# Altium PCB first_test.PcbDoc (part 5 of 5)
Units mil, origin at the board's own origin, x right, y up, seen from the top; angles counter-clockwise.
Board outline 3440.59 x 3087.6 mil, 4 copper layers (Top Layer, GND, VCC, Bottom Layer); 175 components, 91 nets, 2807 pads, 1128 vias.
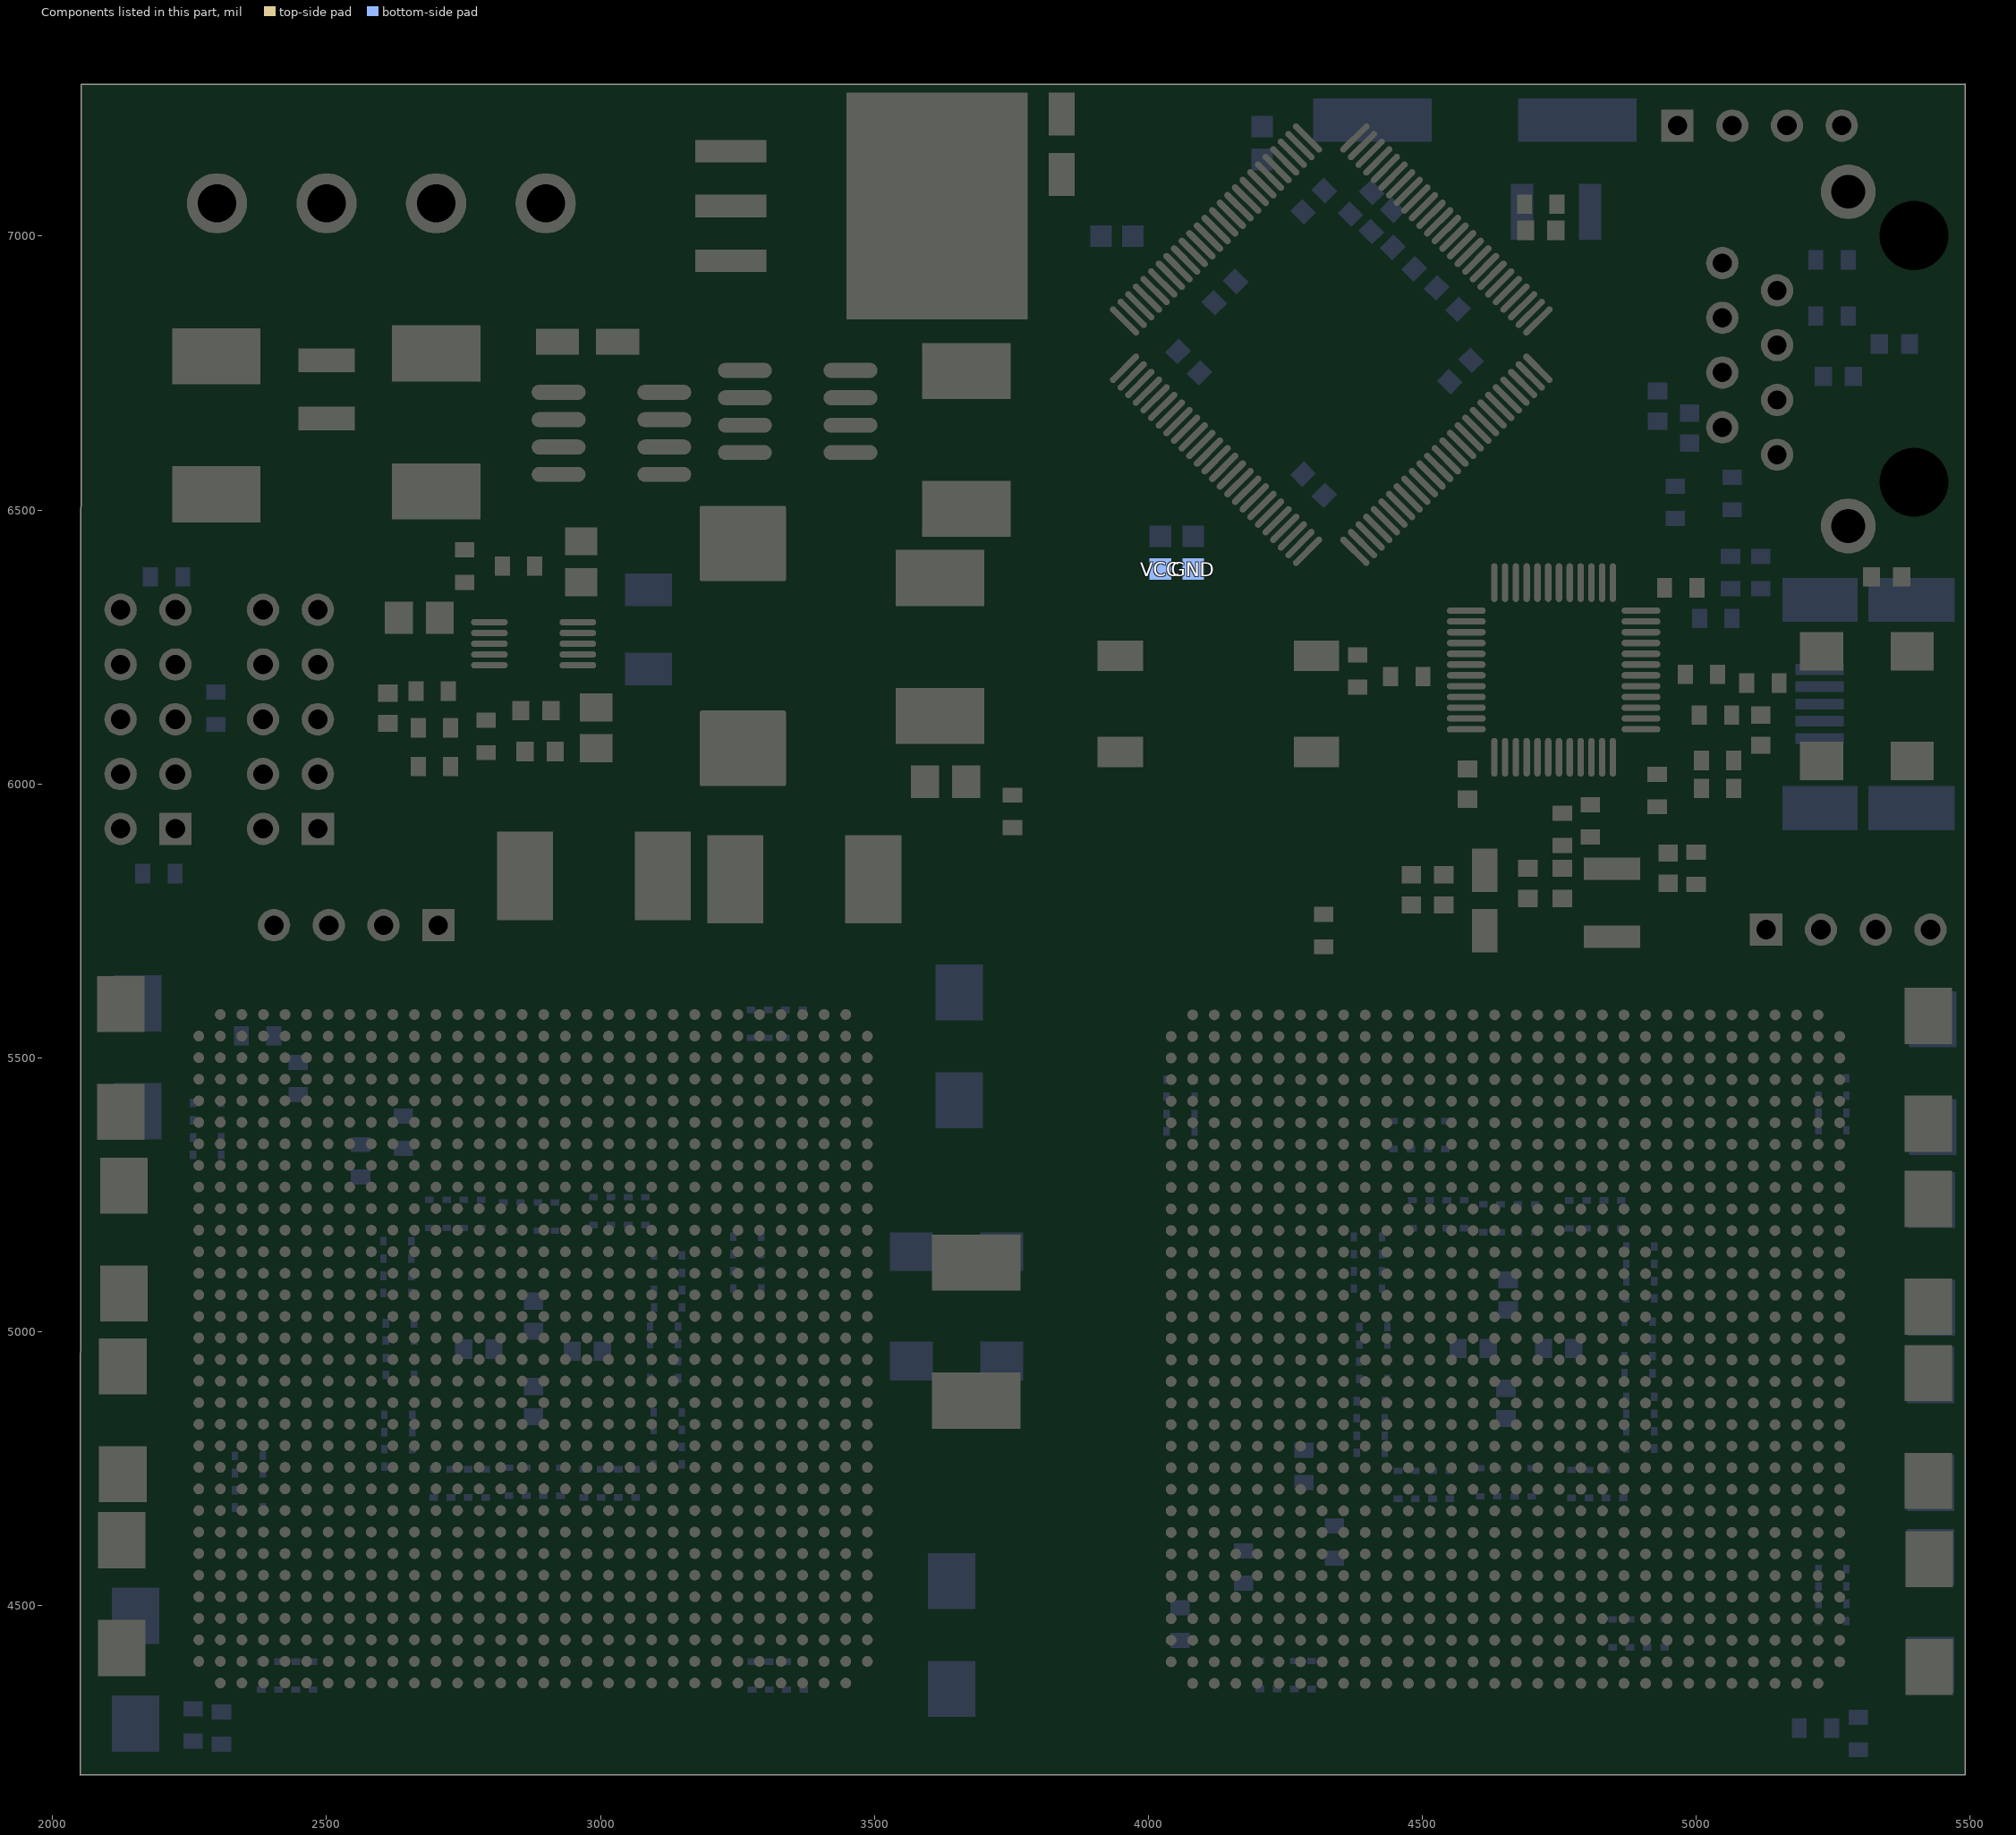
[diagram p7: the components of this part, seen from the top]

## Via types
v1: diameter 20, hole 13, Top Layer to Bottom Layer, tented both sides, 907 vias
v2: diameter 20, hole 13, Top Layer to Bottom Layer, 189 vias
v3: diameter 30, hole 20, Top Layer to Bottom Layer, 14 vias
v4: diameter 40, hole 30, Top Layer to Bottom Layer, 12 vias
v5: diameter 50, hole 40, Top Layer to Bottom Layer, 5 vias
v6: diameter 25, hole 20, Top Layer to Bottom Layer, 1 vias

## Nets (pads, with @x,y where several pads share a name; then routed paths per layer and width w, separated by ;. In a path a pad name is that pad's centre, name@x,y a point inside that pad or via, vN(x,y) a via of type N, cw(c..) or ccw(c..) an arc to the next point about the centre after c; other vN are vias at no path point) (continued)
pads on no net: ARM.4 ARM.6 ARM.7 ARM.8 ARM.9 ARM.14 ARM.16 ARM.18 ARM.20 ARM.21 ARM.26 ARM.27 ARM.32 ARM.33 ARM.34 ARM.35 ARM.36 ARM.37 ARM.38 ARM.39 ARM.40 ARM.43 ARM.44 ARM.45 ARM.46 ARM.47 ARM.50 ARM.51 ARM.56 ARM.57 ARM.58 ARM.59 ARM.60 ARM.61 ARM.76 ARM.77 ARM.78 ARM.79 ARM.80 ARM.81 ARM.82 ARM.85 ARM.100 ETHERNET.1 ETHERNET.5 ETHERNET.6 ETHERNET.8 ETHERNET.9 ETHERNET.10 ETHERNET.11 ETHERNET.12 ETHERNET.25 ETHERNET.33 ETHERNET.38 ETHERNET.42 ETHERNET.45 ETHERNET.46 FPGA1.A4 FPGA1.A5 FPGA1.A6 FPGA1.A7 FPGA1.A8 FPGA1.A9 FPGA1.A10 FPGA1.A11 FPGA1.A12 FPGA1.A14 FPGA1.A16 FPGA1.A17 FPGA1.A21 FPGA1.A22 FPGA1.A23 FPGA1.A24 FPGA1.A25 FPGA1.A26 FPGA1.A27 FPGA1.A28 FPGA1.A29 FPGA1.AA1 FPGA1.AA2 FPGA1.AA3 FPGA1.AA4 FPGA1.AA6 FPGA1.AA7 FPGA1.AA8 FPGA1.AA9 FPGA1.AA10 FPGA1.AA11 FPGA1.AA22 FPGA1.AA23 FPGA1.AA24 FPGA1.AA25 FPGA1.AA26 FPGA1.AA27 FPGA1.AA29 FPGA1.AA30 FPGA1.AA31 FPGA1.AA32 FPGA1.AB1 FPGA1.AB2 FPGA1.AB3 FPGA1.AB4 FPGA1.AB5 FPGA1.AB6 FPGA1.AB7 FPGA1.AB8 FPGA1.AB9 FPGA1.AB10 FPGA1.AB11 FPGA1.AB12 FPGA1.AB13 FPGA1.AB14 FPGA1.AB15 FPGA1.AB16 FPGA1.AB17 FPGA1.AB18 FPGA1.AB19 FPGA1.AB20 FPGA1.AB21 FPGA1.AB23 FPGA1.AB24 FPGA1.AB25 FPGA1.AB26 FPGA1.AB27 FPGA1.AB28 FPGA1.AB29 FPGA1.AB30 FPGA1.AB31 FPGA1.AB32 FPGA1.AC1 FPGA1.AC2 FPGA1.AC3 FPGA1.AC4 FPGA1.AC6 FPGA1.AC7 FPGA1.AC8 FPGA1.AC9 FPGA1.AC11 FPGA1.AC12 FPGA1.AC13 FPGA1.AC14 FPGA1.AC15 FPGA1.AC16 FPGA1.AC17 FPGA1.AC18 FPGA1.AC19 FPGA1.AC20 FPGA1.AC21 FPGA1.AC22 FPGA1.AC24 FPGA1.AC25 FPGA1.AC26 FPGA1.AC27 FPGA1.AC29 FPGA1.AC30 FPGA1.AC31 FPGA1.AC32 FPGA1.AD1 FPGA1.AD2 FPGA1.AD3 FPGA1.AD4 FPGA1.AD6 FPGA1.AD7 FPGA1.AD8 FPGA1.AD9 FPGA1.AD10 FPGA1.AD11 FPGA1.AD12 FPGA1.AD13 FPGA1.AD14 FPGA1.AD18 FPGA1.AD19 FPGA1.AD20 FPGA1.AD21 FPGA1.AD22 FPGA1.AD23 FPGA1.AD24 FPGA1.AD25 FPGA1.AD26 FPGA1.AD27 FPGA1.AD29 FPGA1.AD30 FPGA1.AD31 FPGA1.AD32 FPGA1.AE1 FPGA1.AE2 FPGA1.AE3 FPGA1.AE4 FPGA1.AE5 FPGA1.AE6 FPGA1.AE9 FPGA1.AE10 FPGA1.AE11 FPGA1.AE12 FPGA1.AE13 FPGA1.AE14 FPGA1.AE19 FPGA1.AE20 FPGA1.AE21 FPGA1.AE22 FPGA1.AE23 FPGA1.AE25 FPGA1.AE26 FPGA1.AE27 FPGA1.AE28 FPGA1.AE29 FPGA1.AE30 FPGA1.AE31 FPGA1.AE32 FPGA1.AF1 FPGA1.AF2 FPGA1.AF3 FPGA1.AF4 FPGA1.AF5 FPGA1.AF6 FPGA1.AF10 FPGA1.AF11 FPGA1.AF12 FPGA1.AF13 FPGA1.AF14 FPGA1.AF15 FPGA1.AF16 FPGA1.AF19 FPGA1.AF20 FPGA1.AF21 FPGA1.AF22 FPGA1.AF23 FPGA1.AF27 FPGA1.AF28 FPGA1.AF29 FPGA1.AF30 FPGA1.AF31 FPGA1.AF32 FPGA1.AG1 FPGA1.AG2 FPGA1.AG3 FPGA1.AG4 FPGA1.AG8 FPGA1.AG9 FPGA1.AG10 FPGA1.AG11 FPGA1.AG12 FPGA1.AG13 FPGA1.AG14 FPGA1.AG15 FPGA1.AG16 FPGA1.AG17 FPGA1.AG18 FPGA1.AG19 FPGA1.AG20 FPGA1.AG21 FPGA1.AG22 FPGA1.AG23 FPGA1.AG24 FPGA1.AG25 FPGA1.AG29 FPGA1.AG30 FPGA1.AG31 FPGA1.AG32 FPGA1.AH1 FPGA1.AH2 FPGA1.AH3 FPGA1.AH4 FPGA1.AH5 FPGA1.AH6 FPGA1.AH7 FPGA1.AH8 FPGA1.AH9 FPGA1.AH11 FPGA1.AH13 FPGA1.AH14 FPGA1.AH15 FPGA1.AH16 FPGA1.AH17 FPGA1.AH18 FPGA1.AH19 FPGA1.AH20 FPGA1.AH22 FPGA1.AH24 FPGA1.AH25 FPGA1.AH26 FPGA1.AH28 FPGA1.AH29 FPGA1.AH30 FPGA1.AH31 FPGA1.AH32 FPGA1.AJ1 FPGA1.AJ2 FPGA1.AJ5 FPGA1.AJ6 FPGA1.AJ7 FPGA1.AJ8 FPGA1.AJ10 FPGA1.AJ11 FPGA1.AJ12 FPGA1.AJ13 FPGA1.AJ14 FPGA1.AJ15 FPGA1.AJ16 FPGA1.AJ17 FPGA1.AJ18 FPGA1.AJ19 FPGA1.AJ20 FPGA1.AJ21 FPGA1.AJ22 FPGA1.AJ23 FPGA1.AJ25 FPGA1.AJ26 FPGA1.AJ27 FPGA1.AJ28 FPGA1.AJ31 FPGA1.AJ32 FPGA1.AK4 FPGA1.AK5 FPGA1.AK6 FPGA1.AK7 FPGA1.AK8 FPGA1.AK9 FPGA1.AK10 FPGA1.AK11 FPGA1.AK12 FPGA1.AK13 FPGA1.AK16 FPGA1.AK17 FPGA1.AK18 FPGA1.AK20 FPGA1.AK21 FPGA1.AK22 FPGA1.AK23 FPGA1.AK24 FPGA1.AK25 FPGA1.AK26 FPGA1.AK27 FPGA1.AK28 FPGA1.AK29 FPGA1.AK30 FPGA1.AL3 FPGA1.AL4 FPGA1.AL5 FPGA1.AL6 FPGA1.AL7 FPGA1.AL8 FPGA1.AL9 FPGA1.AL10 FPGA1.AL11 FPGA1.AL12 FPGA1.AL13 FPGA1.AL14 FPGA1.AL16 FPGA1.AL17 FPGA1.AL18 FPGA1.AL20 FPGA1.AL21 FPGA1.AL22 FPGA1.AL23 FPGA1.AL24 FPGA1.AL25 FPGA1.AL26 FPGA1.AL27 FPGA1.AL28 FPGA1.AL29 FPGA1.AM4 FPGA1.AM5 FPGA1.AM6 FPGA1.AM7 FPGA1.AM8 FPGA1.AM9 FPGA1.AM10 FPGA1.AM11 FPGA1.AM12 FPGA1.AM14 FPGA1.AM16 FPGA1.AM17 FPGA1.AM21 FPGA1.AM22 FPGA1.AM23 FPGA1.AM24 FPGA1.AM25 FPGA1.AM26 FPGA1.AM27 FPGA1.AM28 FPGA1.AM29 FPGA1.B4 FPGA1.B5 FPGA1.B6 FPGA1.B7 FPGA1.B8 FPGA1.B9 FPGA1.B10 FPGA1.B11 FPGA1.B12 FPGA1.B13 FPGA1.B14 FPGA1.B15 FPGA1.B16 FPGA1.B17 FPGA1.B18 FPGA1.B20 FPGA1.B21 FPGA1.B22 FPGA1.B23 FPGA1.B24 FPGA1.B25 FPGA1.B26 FPGA1.B27 FPGA1.B28 FPGA1.B29 FPGA1.C4 FPGA1.C5 FPGA1.C6 FPGA1.C7 FPGA1.C8 FPGA1.C9 FPGA1.C10 FPGA1.C11 FPGA1.C12 FPGA1.C13 FPGA1.C15 FPGA1.C16 FPGA1.C17 FPGA1.C18 FPGA1.C20 FPGA1.C21 FPGA1.C22 FPGA1.C23 FPGA1.C24 FPGA1.C25 FPGA1.C26 FPGA1.C27 FPGA1.C28 FPGA1.C29 FPGA1.D1 FPGA1.D2 FPGA1.D5 FPGA1.D6 FPGA1.D7 FPGA1.D8 FPGA1.D10 FPGA1.D11 FPGA1.D12 FPGA1.D13 FPGA1.D14 FPGA1.D16 FPGA1.D17 FPGA1.D18 FPGA1.D19 FPGA1.D20 FPGA1.D21 FPGA1.D22 FPGA1.D23 FPGA1.D25 FPGA1.D26 FPGA1.D27 FPGA1.D28 FPGA1.D31 FPGA1.D32 FPGA1.E1 FPGA1.E2 FPGA1.E3 FPGA1.E4 FPGA1.E5 FPGA1.E6 FPGA1.E7 FPGA1.E8 FPGA1.E9 FPGA1.E11 FPGA1.E13 FPGA1.E14 FPGA1.E16 FPGA1.E17 FPGA1.E18 FPGA1.E19 FPGA1.E20 FPGA1.E22 FPGA1.E24 FPGA1.E25 FPGA1.E26 FPGA1.E27 FPGA1.E28 FPGA1.E29 FPGA1.E30 FPGA1.E31 FPGA1.E32 FPGA1.F1 FPGA1.F2 FPGA1.F3 FPGA1.F4 FPGA1.F8 FPGA1.F9 FPGA1.F10 FPGA1.F11 FPGA1.F12 FPGA1.F13 FPGA1.F14 FPGA1.F15 FPGA1.F16 FPGA1.F17 FPGA1.F18 FPGA1.F19 FPGA1.F21 FPGA1.F22 FPGA1.F23 FPGA1.F25 FPGA1.F29 FPGA1.F30 FPGA1.F31 FPGA1.F32 FPGA1.G1 FPGA1.G2 FPGA1.G3 FPGA1.G4 FPGA1.G5 FPGA1.G6 FPGA1.G10 FPGA1.G11 FPGA1.G12 FPGA1.G13 FPGA1.G14 FPGA1.G19 FPGA1.G20 FPGA1.G21 FPGA1.G22 FPGA1.G25 FPGA1.G27 FPGA1.G28 FPGA1.G29 FPGA1.G30 FPGA1.G31 FPGA1.G32 FPGA1.H1 FPGA1.H2 FPGA1.H3 FPGA1.H4 FPGA1.H5 FPGA1.H6 FPGA1.H9 FPGA1.H11 FPGA1.H12 FPGA1.H13 FPGA1.H14 FPGA1.H20 FPGA1.H21 FPGA1.H22 FPGA1.H24 FPGA1.H27 FPGA1.H28 FPGA1.H29 FPGA1.H30 FPGA1.H31 FPGA1.H32 FPGA1.J1 FPGA1.J2 FPGA1.J3 FPGA1.J4 FPGA1.J6 FPGA1.J7 FPGA1.J8 FPGA1.J9 FPGA1.J11 FPGA1.J12 FPGA1.J13 FPGA1.J14 FPGA1.J15 FPGA1.J16 FPGA1.J17 FPGA1.J19 FPGA1.J20 FPGA1.J21 FPGA1.J22 FPGA1.J26 FPGA1.J27 FPGA1.J29 FPGA1.J30 FPGA1.J31 FPGA1.J32 FPGA1.K1 FPGA1.K2 FPGA1.K3 FPGA1.K4 FPGA1.K6 FPGA1.K7 FPGA1.K8 FPGA1.K9 FPGA1.K11 FPGA1.K12 FPGA1.K13 FPGA1.K14 FPGA1.K15 FPGA1.K16 FPGA1.K17 FPGA1.K18 FPGA1.K19 FPGA1.K20 FPGA1.K21 FPGA1.K22 FPGA1.K24 FPGA1.K25 FPGA1.K26 FPGA1.K27 FPGA1.K29 FPGA1.K30 FPGA1.K31 FPGA1.K32 FPGA1.L1 FPGA1.L2 FPGA1.L3 FPGA1.L4 FPGA1.L5 FPGA1.L6 FPGA1.L7 FPGA1.L8 FPGA1.L9 FPGA1.L10 FPGA1.L12 FPGA1.L13 FPGA1.L14 FPGA1.L15 FPGA1.L16 FPGA1.L17 FPGA1.L18 FPGA1.L19 FPGA1.L20 FPGA1.L21 FPGA1.L23 FPGA1.L24 FPGA1.L25 FPGA1.L26 FPGA1.L27 FPGA1.L28 FPGA1.L29 FPGA1.L30 FPGA1.L31 FPGA1.L32 FPGA1.M1 FPGA1.M2 FPGA1.M3 FPGA1.M4 FPGA1.M6 FPGA1.M7 FPGA1.M8 FPGA1.M9 FPGA1.M10 FPGA1.M11 FPGA1.M22 FPGA1.M23 FPGA1.M24 FPGA1.M25 FPGA1.M26 FPGA1.M27 FPGA1.M29 FPGA1.M30 FPGA1.M31 FPGA1.M32 FPGA1.N2 FPGA1.N3 FPGA1.N4 FPGA1.N5 FPGA1.N6 FPGA1.N7 FPGA1.N8 FPGA1.N9 FPGA1.N10 FPGA1.N11 FPGA1.N22 FPGA1.N23 FPGA1.N24 FPGA1.N25 FPGA1.N26 FPGA1.N27 FPGA1.N28 FPGA1.N29 FPGA1.N30 FPGA1.N31 FPGA1.P1 FPGA1.P2 FPGA1.P4 FPGA1.P5 FPGA1.P6 FPGA1.P7 FPGA1.P8 FPGA1.P9 FPGA1.P10 FPGA1.P11 FPGA1.P22 FPGA1.P23 FPGA1.P24 FPGA1.P25 FPGA1.P26 FPGA1.P27 FPGA1.P28 FPGA1.P29 FPGA1.P31 FPGA1.P32 FPGA1.R2 FPGA1.R3 FPGA1.R4 FPGA1.R5 FPGA1.R6 FPGA1.R7 FPGA1.R10 FPGA1.R11 FPGA1.R22 FPGA1.R23 FPGA1.R24 FPGA1.R25 FPGA1.R26 FPGA1.R27 FPGA1.R28 FPGA1.R29 FPGA1.R30 FPGA1.R31 FPGA1.T1 FPGA1.T2 FPGA1.T5 FPGA1.T6 FPGA1.T10 FPGA1.T11 FPGA1.T22 FPGA1.T23 FPGA1.T27 FPGA1.T28 FPGA1.T31 FPGA1.T32 FPGA1.U1 FPGA1.U2 FPGA1.U5 FPGA1.U6 FPGA1.U10 FPGA1.U11 FPGA1.U22 FPGA1.U23 FPGA1.U27 FPGA1.U28 FPGA1.U31 FPGA1.U32 FPGA1.V2 FPGA1.V3 FPGA1.V4 FPGA1.V5 FPGA1.V6 FPGA1.V7 FPGA1.V9 FPGA1.V10 FPGA1.V23 FPGA1.V24 FPGA1.V28 FPGA1.V29 FPGA1.V30 FPGA1.V31 FPGA1.W1 FPGA1.W2 FPGA1.W4 FPGA1.W5 FPGA1.W6 FPGA1.W7 FPGA1.W8 FPGA1.W9 FPGA1.W10 FPGA1.W11 FPGA1.W22 FPGA1.W23 FPGA1.W24 FPGA1.W25 FPGA1.W26 FPGA1.W27 FPGA1.W28 FPGA1.W29 FPGA1.W31 FPGA1.W32 FPGA1.Y2 FPGA1.Y3 FPGA1.Y4 FPGA1.Y5 FPGA1.Y6 FPGA1.Y7 FPGA1.Y8 FPGA1.Y9 FPGA1.Y10 FPGA1.Y11 FPGA1.Y22 FPGA1.Y23 FPGA1.Y24 FPGA1.Y25 FPGA1.Y26 FPGA1.Y27 FPGA1.Y28 FPGA1.Y29 FPGA1.Y30 FPGA1.Y31 FPGA.A4 FPGA.A5 FPGA.A6 FPGA.A7 FPGA.A8 FPGA.A9 FPGA.A10 FPGA.A11 FPGA.A12 FPGA.A14 FPGA.A16 FPGA.A17 FPGA.A21 FPGA.A22 FPGA.A23 FPGA.A24 FPGA.A25 FPGA.A26 FPGA.A27 FPGA.A28 FPGA.A29 FPGA.AA1 FPGA.AA2 FPGA.AA3 FPGA.AA4 FPGA.AA6 FPGA.AA7 FPGA.AA8 FPGA.AA9 FPGA.AA10 FPGA.AA11 FPGA.AA22 FPGA.AA23 FPGA.AA24 FPGA.AA25 FPGA.AA26 FPGA.AA27 FPGA.AA29 FPGA.AA30 FPGA.AA31 FPGA.AA32 FPGA.AB1 FPGA.AB2 FPGA.AB3 FPGA.AB4 FPGA.AB5 FPGA.AB6 FPGA.AB7 FPGA.AB8 FPGA.AB9 FPGA.AB10 FPGA.AB11 FPGA.AB12 FPGA.AB13 FPGA.AB14 FPGA.AB15 FPGA.AB16 FPGA.AB17 FPGA.AB18 FPGA.AB19 FPGA.AB20 FPGA.AB21 FPGA.AB23 FPGA.AB24 FPGA.AB25 FPGA.AB26 FPGA.AB27 FPGA.AB28 FPGA.AB29 FPGA.AB30 FPGA.AB31 FPGA.AB32 FPGA.AC1 FPGA.AC2 FPGA.AC3 FPGA.AC4 FPGA.AC6 FPGA.AC7 FPGA.AC8 FPGA.AC9 FPGA.AC11 FPGA.AC12 FPGA.AC13 FPGA.AC14 FPGA.AC15 FPGA.AC16 FPGA.AC17 FPGA.AC18 FPGA.AC19 FPGA.AC20 FPGA.AC21 FPGA.AC22 FPGA.AC24 FPGA.AC25 FPGA.AC26 FPGA.AC27 FPGA.AC29 FPGA.AC30 FPGA.AC31 FPGA.AC32 FPGA.AD1 FPGA.AD2 FPGA.AD3 FPGA.AD4 FPGA.AD6 FPGA.AD7 FPGA.AD8 FPGA.AD9 FPGA.AD10 FPGA.AD11 FPGA.AD12 FPGA.AD13 FPGA.AD14 FPGA.AD18 FPGA.AD19 FPGA.AD20 FPGA.AD21 FPGA.AD22 FPGA.AD23 FPGA.AD24 FPGA.AD25 FPGA.AD26 FPGA.AD27 FPGA.AD29 FPGA.AD30 FPGA.AD31 FPGA.AD32 FPGA.AE1 FPGA.AE2 FPGA.AE3 FPGA.AE4 FPGA.AE5 FPGA.AE6 FPGA.AE9 FPGA.AE10 FPGA.AE11 FPGA.AE12 FPGA.AE13 FPGA.AE14 FPGA.AE19 FPGA.AE20 FPGA.AE21 FPGA.AE22 FPGA.AE23 FPGA.AE25 FPGA.AE26 FPGA.AE27 FPGA.AE28 FPGA.AE29 FPGA.AE30 FPGA.AE31 FPGA.AE32 FPGA.AF1 FPGA.AF2 FPGA.AF3 FPGA.AF4 FPGA.AF5 FPGA.AF6 FPGA.AF10 FPGA.AF11 FPGA.AF12 FPGA.AF13 FPGA.AF14 FPGA.AF15 FPGA.AF16 FPGA.AF19 FPGA.AF20 FPGA.AF21 FPGA.AF22 FPGA.AF23 FPGA.AF27 FPGA.AF28 FPGA.AF29 FPGA.AF30 FPGA.AF31 FPGA.AF32 FPGA.AG1 FPGA.AG2 FPGA.AG3 FPGA.AG4 FPGA.AG8 FPGA.AG9 FPGA.AG10 FPGA.AG11 FPGA.AG12 FPGA.AG13 FPGA.AG14 FPGA.AG15 FPGA.AG16 FPGA.AG17 FPGA.AG18 FPGA.AG19 FPGA.AG20 FPGA.AG21 FPGA.AG22 FPGA.AG23 FPGA.AG24 FPGA.AG25 FPGA.AG29 FPGA.AG30 FPGA.AG31 FPGA.AG32 FPGA.AH1 FPGA.AH2 FPGA.AH3 FPGA.AH4 FPGA.AH5 FPGA.AH6 FPGA.AH7 FPGA.AH8 FPGA.AH9 FPGA.AH11 FPGA.AH13 FPGA.AH14 FPGA.AH15 FPGA.AH16 FPGA.AH17 FPGA.AH18 FPGA.AH19 FPGA.AH20 FPGA.AH22 FPGA.AH24 FPGA.AH25 FPGA.AH26 FPGA.AH28 FPGA.AH29 FPGA.AH30 FPGA.AH31 FPGA.AH32 FPGA.AJ1 FPGA.AJ2 FPGA.AJ5 FPGA.AJ6 FPGA.AJ7 FPGA.AJ8 FPGA.AJ10 FPGA.AJ11 FPGA.AJ12 FPGA.AJ13 FPGA.AJ14 FPGA.AJ15 FPGA.AJ16 FPGA.AJ17 FPGA.AJ18 FPGA.AJ19 FPGA.AJ20 FPGA.AJ21 FPGA.AJ22 FPGA.AJ23 FPGA.AJ25 FPGA.AJ26 FPGA.AJ27 FPGA.AJ28 FPGA.AJ31 FPGA.AJ32 FPGA.AK4 FPGA.AK5 FPGA.AK6 FPGA.AK7 FPGA.AK8 FPGA.AK9 FPGA.AK10 FPGA.AK11 FPGA.AK12 FPGA.AK13 FPGA.AK16 FPGA.AK17 FPGA.AK18 FPGA.AK20 FPGA.AK21 FPGA.AK22 FPGA.AK23 FPGA.AK24 FPGA.AK25 FPGA.AK26 FPGA.AK27 FPGA.AK28 FPGA.AK29 FPGA.AK30 FPGA.AL4 FPGA.AL5 FPGA.AL6 FPGA.AL7 FPGA.AL8 FPGA.AL9 FPGA.AL10 FPGA.AL11 FPGA.AL12 FPGA.AL13 FPGA.AL14 FPGA.AL16 FPGA.AL17 FPGA.AL18 FPGA.AL20 FPGA.AL21 FPGA.AL22 FPGA.AL23 FPGA.AL24 FPGA.AL25 FPGA.AL26 FPGA.AL27 FPGA.AL28 FPGA.AL29 FPGA.AM4 FPGA.AM5 FPGA.AM6 FPGA.AM7 FPGA.AM8 FPGA.AM9 FPGA.AM10 FPGA.AM11 FPGA.AM12 FPGA.AM14 FPGA.AM16 FPGA.AM17 FPGA.AM21 FPGA.AM22 FPGA.AM23 FPGA.AM24 FPGA.AM25 FPGA.AM26 FPGA.AM27 FPGA.AM28 FPGA.AM29 FPGA.B4 FPGA.B5 FPGA.B6 FPGA.B7 FPGA.B8 FPGA.B9 FPGA.B10 FPGA.B11 FPGA.B12 FPGA.B13 FPGA.B14 FPGA.B15 FPGA.B16 FPGA.B17 FPGA.B18 FPGA.B20 FPGA.B21 FPGA.B22 FPGA.B23 FPGA.B24 FPGA.B25 FPGA.B26 FPGA.B27 FPGA.B28 FPGA.B29 FPGA.C4 FPGA.C5 FPGA.C6 FPGA.C7 FPGA.C8 FPGA.C9 FPGA.C10 FPGA.C11 FPGA.C12 FPGA.C13 FPGA.C15 FPGA.C16 FPGA.C17 FPGA.C18 FPGA.C20 FPGA.C21 FPGA.C22 FPGA.C23 FPGA.C24 FPGA.C25 FPGA.C26 FPGA.C27 FPGA.C28 FPGA.C29 FPGA.D1 FPGA.D2 FPGA.D5 FPGA.D6 FPGA.D7 FPGA.D8 FPGA.D10 FPGA.D11 FPGA.D12 FPGA.D13 FPGA.D14 FPGA.D16 FPGA.D17 FPGA.D18 FPGA.D19 FPGA.D20 FPGA.D21 FPGA.D22 FPGA.D23 FPGA.D25 FPGA.D26 FPGA.D27 FPGA.D28 FPGA.D31 FPGA.D32 FPGA.E1 FPGA.E2 FPGA.E3 FPGA.E4 FPGA.E5 FPGA.E6 FPGA.E7 FPGA.E8 FPGA.E9 FPGA.E11 FPGA.E13 FPGA.E14 FPGA.E16 FPGA.E17 FPGA.E18 FPGA.E19 FPGA.E20 FPGA.E22 FPGA.E24 FPGA.E25 FPGA.E26 FPGA.E27 FPGA.E28 FPGA.E29 FPGA.E30 FPGA.E31 FPGA.E32 FPGA.F1 FPGA.F2 FPGA.F3 FPGA.F4 FPGA.F8 FPGA.F9 FPGA.F10 FPGA.F11 FPGA.F12 FPGA.F13 FPGA.F14 FPGA.F15 FPGA.F16 FPGA.F17 FPGA.F18 FPGA.F19 FPGA.F21 FPGA.F22 FPGA.F23 FPGA.F25 FPGA.F29 FPGA.F30 FPGA.F31 FPGA.F32 FPGA.G1 FPGA.G2 FPGA.G3 FPGA.G4 FPGA.G5 FPGA.G6 FPGA.G10 FPGA.G11 FPGA.G12 FPGA.G13 FPGA.G14 FPGA.G19 FPGA.G20 FPGA.G21 FPGA.G22 FPGA.G25 FPGA.G27 FPGA.G28 FPGA.G29 FPGA.G30 FPGA.G31 FPGA.G32 FPGA.H1 FPGA.H2 FPGA.H3 FPGA.H4 FPGA.H5 FPGA.H6 FPGA.H9 FPGA.H11 FPGA.H12 FPGA.H13 FPGA.H14 FPGA.H20 FPGA.H21 FPGA.H22 FPGA.H24 FPGA.H27 FPGA.H28 FPGA.H29 FPGA.H30 FPGA.H31 FPGA.H32 FPGA.J1 FPGA.J2 FPGA.J3 FPGA.J4 FPGA.J6 FPGA.J7 FPGA.J8 FPGA.J9 FPGA.J11 FPGA.J12 FPGA.J13 FPGA.J14 FPGA.J15 FPGA.J16 FPGA.J17 FPGA.J19 FPGA.J20 FPGA.J21 FPGA.J22 FPGA.J26 FPGA.J27 FPGA.J29 FPGA.J30 FPGA.J31 FPGA.J32 FPGA.K1 FPGA.K2 FPGA.K3 FPGA.K4 FPGA.K6 FPGA.K7 FPGA.K8 FPGA.K9 FPGA.K11 FPGA.K12 FPGA.K13 FPGA.K14 FPGA.K15 FPGA.K16 FPGA.K17 FPGA.K18 FPGA.K19 FPGA.K20 FPGA.K21 FPGA.K22 FPGA.K24 FPGA.K25 FPGA.K26 FPGA.K27 FPGA.K29 FPGA.K30 FPGA.K31 FPGA.K32 FPGA.L1 FPGA.L2 FPGA.L3 FPGA.L4 FPGA.L5 FPGA.L6 FPGA.L7 FPGA.L8 FPGA.L9 FPGA.L10 FPGA.L12 FPGA.L13 FPGA.L14 FPGA.L15 FPGA.L16 FPGA.L17 FPGA.L18 FPGA.L19 FPGA.L20 FPGA.L21 FPGA.L23 FPGA.L24 FPGA.L25 FPGA.L26 FPGA.L27 FPGA.L28 FPGA.L29 FPGA.L30 FPGA.L31 FPGA.L32 FPGA.M1 FPGA.M2 FPGA.M3 FPGA.M4 FPGA.M6 FPGA.M7 FPGA.M8 FPGA.M9 FPGA.M10 FPGA.M11 FPGA.M22 FPGA.M23 FPGA.M24 FPGA.M25 FPGA.M26 FPGA.M27 FPGA.M29 FPGA.M30 FPGA.M31 FPGA.M32 FPGA.N2 FPGA.N3 FPGA.N4 FPGA.N5 FPGA.N6 FPGA.N7 FPGA.N8 FPGA.N9 FPGA.N10 FPGA.N11 FPGA.N22 FPGA.N23 FPGA.N24 FPGA.N25 FPGA.N26 FPGA.N27 FPGA.N28 FPGA.N29 FPGA.N30 FPGA.N31 FPGA.P1 FPGA.P2 FPGA.P4 FPGA.P5 FPGA.P6 FPGA.P7 FPGA.P8 FPGA.P9 FPGA.P10 FPGA.P11 FPGA.P22 FPGA.P23 FPGA.P24 FPGA.P25 FPGA.P26 FPGA.P27 FPGA.P28 FPGA.P29 FPGA.P31 FPGA.P32 FPGA.R2 FPGA.R3 FPGA.R4 FPGA.R5 FPGA.R6 FPGA.R7 FPGA.R10 FPGA.R11 FPGA.R22 FPGA.R23 FPGA.R24 FPGA.R25 FPGA.R26 FPGA.R27 FPGA.R28 FPGA.R29 FPGA.R30 FPGA.R31 FPGA.T1 FPGA.T2 FPGA.T5 FPGA.T6 FPGA.T10 FPGA.T11 FPGA.T22 FPGA.T23 FPGA.T27 FPGA.T28 FPGA.T31 FPGA.T32 FPGA.U1 FPGA.U2 FPGA.U5 FPGA.U6 FPGA.U10 FPGA.U11 FPGA.U22 FPGA.U23 FPGA.U27 FPGA.U28 FPGA.U31 FPGA.U32 FPGA.V2 FPGA.V3 FPGA.V4 FPGA.V5 FPGA.V6 FPGA.V7 FPGA.V9 FPGA.V10 FPGA.V23 FPGA.V24 FPGA.V28 FPGA.V29 FPGA.V30 FPGA.V31 FPGA.W1 FPGA.W2 FPGA.W4 FPGA.W5 FPGA.W6 FPGA.W7 FPGA.W8 FPGA.W9 FPGA.W10 FPGA.W11 FPGA.W22 FPGA.W23 FPGA.W24 FPGA.W25 FPGA.W26 FPGA.W27 FPGA.W28 FPGA.W29 FPGA.W31 FPGA.W32 FPGA.Y2 FPGA.Y3 FPGA.Y4 FPGA.Y5 FPGA.Y6 FPGA.Y7 FPGA.Y8 FPGA.Y9 FPGA.Y10 FPGA.Y11 FPGA.Y22 FPGA.Y23 FPGA.Y24 FPGA.Y25 FPGA.Y26 FPGA.Y27 FPGA.Y28 FPGA.Y29 FPGA.Y30 FPGA.Y31 H1.7 H1.8 RJ45.7 RJ45.c RJ45.d U.2 U.5
copper on no net: | length 0.4
  Top Layer w6: 4791.26,5815.65 4791.55,5815.37

## Polygon pours and split planes (outlines as drawn)
VCCPD on VCC "VCCPD-Pour" (solid, pour order 1006): 3307.09,7275.59 5496.06,7275.59 5496.06,5700.79 5487.99,5708.66 4316.76,5708.66 4316.76,5724.41 3904.81,6125.98
VCCINT on VCC "VCCINT-Pour" (solid, pour order 1007): 2047.24,7283.46 5496.06,7283.46 5496.06,4196.85 2047.24,4196.85
VCCPD on VCC "VCCPD2-Pour" (solid, pour order 1004): 2228.35,5622.05 2834.65,5622.05 2842.52,5614.17 2842.52,5519.69 2716.54,5393.7 2708.66,5385.83 2456.69,5385.83 2456.69,4606.3 2464.57,4598.43 2472.44,4590.55 2866.14,4590.55 2929.13,4527.56 2937.01,4519.69 3165.35,4519.69 3165.35,4582.68 3236.22,4653.54 3299.21,4716.54 3299.21,5275.59 3299.21,5322.83 3322.83,5346.46 3196.85,5346.46 3188.98,5346.46 3055.12,5480.31 3031.5,5503.94 2921.26,5503.94 2921.26,5614.17 2929.13,5622.05 3527.56,5622.05 3527.56,4314.96 3511.81,4299.21 3503.94,4307.09 2220.47,4307.09 2220.47,5622.05
VCCPD on VCC "VCCPD3-Pour" (solid, pour order 1003): 3338.58,5220.47 3255.91,5173.23 3228.35,5173.23 3228.35,4968.5 3269.68,4944.88 3338.58,4944.88 3338.58,5220.47
VCCPD on VCC "VCCPD4-Pour" (solid, pour order 1001): 3062.99,5488.19 3047.24,5468.5 3047.24,5438.98 3047.24,5419.29 3055.12,5409.45 3062.99,5419.29 3094.49,5419.29 3094.49,5429.13 3110.24,5448.82
VCCPD on VCC "VCCPD5-Pour" (solid, pour order 1002): 3866.14,6838.58 4129.92,6838.58 4145.67,6822.83 4218.5,6822.83 4246.06,6795.28 4246.06,6537.4 4153.54,6537.4 3872.05,6818.9
VCCPD on VCC "VCCPD2-Pour" (solid, pour order 1000): 3995.75,4321.41 3995.75,4927.71 4003.63,4935.58 4098.12,4935.58 4224.1,4809.6 4231.97,4801.73 4231.97,4549.76 5011.5,4549.76 5019.38,4557.63 5027.25,4565.5 5027.25,4959.21 5090.24,5022.2 5098.12,5030.07 5098.12,5258.42 5035.12,5258.42 4964.26,5329.28 4901.27,5392.28 4342.21,5392.28 4294.97,5392.28 4271.34,5415.9 4271.34,5289.91 4271.34,5282.04 4137.49,5148.18 4113.86,5124.56 4113.86,5014.32 4003.63,5014.32 3995.75,5022.2 3995.75,5620.62 5302.84,5620.62 5318.59,5604.88 5310.71,5597 5310.71,4313.54 3995.75,4313.54
GND on GND "GND-Pour" (solid, pour order 1008): 2047.24,7283.46 5488.19,7283.46 5488.19,4196.85 2047.24,4196.85

## Keep-outs
Keep-Out Layer:
  lines w11.81: 2051.18,4196.3 5492.13,4196.3 5492.13,7279.53 2051.18,7279.53 2051.18,4196.3

## Silkscreen, mask and mechanical layers (free items; w line width, h text height)
Top Overlay:
  text "Power (non std)" at 2177.5,7155.5 h60
  text "TX/RX" at 4784.5,7077 h60
  text "GND/VCC" at 4836.5,6996.5 h60
  text "+5V" at 2204.5,6923 h60
  text "+5V" at 2812,6921 h60
  text "GND" at 2523,6920.5 h60
  text "FPGA CLUSTER 0.2" at 3896.5,4354 h60 r90

## Dimensions
2051.18,4196.3 to 5492.13,4196.3 on Mechanical 1
2051.18,4196.3 to 2051.18,7279.53 on Mechanical 1

## Text inside footprints (layer, text, board x,y; h text height)
H1: Bottom Overlay "10" at 2144,6378 h50 r90; Bottom Overlay "9" at 2247.94,6415.35 h50 r90; Bottom Overlay "1" at 2263.68,5799.21 h50 r90; Bottom Overlay "2" at 2139.67,5820.87 h50 r90
H2: Bottom Overlay "2" at 2346.46,5818.9 h50 r90; Bottom Overlay "1" at 2574.8,5919.29 h50 r180; Bottom Overlay "9" at 2504,6378 h50 r90; Bottom Overlay "10" at 2404,6378 h50 r90